# EAGLE board midicontroller (EAGLE 7.0.0)

Size 159.69 x 80 mm. Coordinates in mm from the lower left corner, seen from the top.
Outline: 0,0 159.69,0 159.69,80 0,80 0,0
Copper layers (1*16): Top 0.035mm / dielectric 1.5mm / Bottom 0.035mm
Design rules "default": minimum track width 10mil, minimum drill 24mil, track to track 8mil, track to pad 8mil, pad to pad 8mil, via to via 8mil, smd to smd 8mil, copper to edge 40mil, drill to drill 8mil, minimum pad ring 10mil, minimum via ring 8mil, stop-mask expansion 4mil, vias tented up to drill 0mil, thermal gap 10mil

## Footprints (pad centres in the part's own frame; a part is rotated, then mirrored left to right if it is on the bottom)
DIL24-6 = drill 0.813 long: 1 -13.97,-7.62; 2 -11.43,-7.62; 3 -8.89,-7.62; 4 -6.35,-7.62; 5 -3.81,-7.62; 6 -1.27,-7.62; 7 1.27,-7.62; 8 3.81,-7.62; 9 6.35,-7.62; 10 8.89,-7.62; 11 11.43,-7.62; 12 13.97,-7.62; 13 13.97,7.62; 14 11.43,7.62; 15 8.89,7.62; 16 6.35,7.62; 17 3.81,7.62; 18 1.27,7.62; 19 -1.27,7.62; 20 -3.81,7.62; 21 -6.35,7.62; 22 -8.89,7.62; 23 -11.43,7.62; 24 -13.97,7.62
2X3 = drill 1.016 pad 1.88 octagon: 1 0,0; 2 0,2.54; 3 2.54,0; 4 2.54,2.54; 5 5.08,0; 6 5.08,2.54
1X02 = drill 1.016 long: 1 -1.27,0; 2 1.27,0
5-2,5 = smd 2.54 x 5.08: 1 0,0
ARDUINO_PRO_MICRO = drill 1.016 pad 1.88: 1 -7.62,12.7; 2 -7.62,10.16; 3 -7.62,7.62; 4 -7.62,5.08; 5 -7.62,2.54; 6 -7.62,0; 7 -7.62,-2.54; 8 -7.62,-5.08; 9 -7.62,-7.62; 10 -7.62,-10.16; 11 -7.62,-12.7; 12 -7.62,-15.24; 13 7.62,-15.24; 14 7.62,-12.7; 15 7.62,-10.16; 16 7.62,-7.62; 17 7.62,-5.08; 18 7.62,-2.54; 19 7.62,0; 20 7.62,2.54; 21 7.62,5.08; 22 7.62,7.62; 23 7.62,10.16; 24 7.62,12.7

## Placement (x,y rotation side)
IC1  4067N  [DIL24-6]  10.16,54.61 270 top
IC2  4067N  [DIL24-6]  29.21,54.61 270 top
IC3  4067N  [DIL24-6]  91.44,49.53 270 top
IC4  4067N  [DIL24-6]  48.26,54.61 270 top
IC5  4067N  [DIL24-6]  69.85,54.61 270 top
JP1  AVR_SPI_PRG_6PTH  [2X3]  -97.79,59.69 0 top  (outside the outline)
JP2  [1X02]  -77.47,109.22 0 top  (outside the outline)
PAD0  WIREPADSMD5-2,5  [5-2,5]  -25.4,110.49 0 top  (outside the outline)
PAD1  WIREPADSMD5-2,5  [5-2,5]  -30.48,110.49 0 top  (outside the outline)
PAD2  WIREPADSMD5-2,5  [5-2,5]  -35.56,110.49 0 top  (outside the outline)
PAD3  WIREPADSMD5-2,5  [5-2,5]  -40.64,110.49 0 top  (outside the outline)
PAD4  WIREPADSMD5-2,5  [5-2,5]  -45.72,110.49 0 top  (outside the outline)
PAD5  WIREPADSMD5-2,5  [5-2,5]  -50.8,110.49 0 top  (outside the outline)
PAD6  WIREPADSMD5-2,5  [5-2,5]  -55.88,110.49 0 top  (outside the outline)
PAD7  WIREPADSMD5-2,5  [5-2,5]  -60.96,110.49 0 top  (outside the outline)
PAD8  WIREPADSMD5-2,5  [5-2,5]  -66.04,110.49 0 top  (outside the outline)
PAD9  WIREPADSMD5-2,5  [5-2,5]  -71.12,110.49 0 top  (outside the outline)
PAD10  WIREPADSMD5-2,5  [5-2,5]  -15.24,80.01 0 top  (outside the outline)
PAD11  WIREPADSMD5-2,5  [5-2,5]  -20.32,80.01 0 top  (outside the outline)
PAD12  WIREPADSMD5-2,5  [5-2,5]  -25.4,80.01 0 top  (outside the outline)
PAD13  WIREPADSMD5-2,5  [5-2,5]  -30.48,80.01 0 top  (outside the outline)
PAD14  WIREPADSMD5-2,5  [5-2,5]  -35.56,80.01 0 top  (outside the outline)
PAD15  WIREPADSMD5-2,5  [5-2,5]  -40.64,80.01 0 top  (outside the outline)
PAD16  WIREPADSMD5-2,5  [5-2,5]  -45.72,80.01 0 top  (outside the outline)
PAD17  WIREPADSMD5-2,5  [5-2,5]  -50.8,80.01 0 top  (outside the outline)
PAD18  WIREPADSMD5-2,5  [5-2,5]  -55.88,80.01 0 top  (outside the outline)
PAD19  WIREPADSMD5-2,5  [5-2,5]  -60.96,80.01 0 top  (outside the outline)
PAD20  WIREPADSMD5-2,5  [5-2,5]  -66.04,80.01 0 top  (outside the outline)
PAD21  WIREPADSMD5-2,5  [5-2,5]  -71.12,80.01 0 top  (outside the outline)
PAD22  WIREPADSMD5-2,5  [5-2,5]  -76.2,80.01 0 top  (outside the outline)
PAD23  WIREPADSMD5-2,5  [5-2,5]  -81.28,80.01 0 top  (outside the outline)
PAD24  WIREPADSMD5-2,5  [5-2,5]  -86.36,80.01 0 top  (outside the outline)
PAD25  WIREPADSMD5-2,5  [5-2,5]  -91.44,80.01 0 top  (outside the outline)
PAD26  WIREPADSMD5-2,5  [5-2,5]  -96.52,80.01 0 top  (outside the outline)
PAD27  WIREPADSMD5-2,5  [5-2,5]  -15.24,87.63 0 top  (outside the outline)
PAD28  WIREPADSMD5-2,5  [5-2,5]  -20.32,87.63 0 top  (outside the outline)
PAD29  WIREPADSMD5-2,5  [5-2,5]  -25.4,87.63 0 top  (outside the outline)
PAD30  WIREPADSMD5-2,5  [5-2,5]  -30.48,87.63 0 top  (outside the outline)
PAD31  WIREPADSMD5-2,5  [5-2,5]  -35.56,87.63 0 top  (outside the outline)
PAD32  WIREPADSMD5-2,5  [5-2,5]  -40.64,87.63 0 top  (outside the outline)
PAD33  WIREPADSMD5-2,5  [5-2,5]  -45.72,87.63 0 top  (outside the outline)
PAD34  WIREPADSMD5-2,5  [5-2,5]  -50.8,87.63 0 top  (outside the outline)
PAD35  WIREPADSMD5-2,5  [5-2,5]  -55.88,87.63 0 top  (outside the outline)
PAD36  WIREPADSMD5-2,5  [5-2,5]  -60.96,87.63 0 top  (outside the outline)
PAD37  WIREPADSMD5-2,5  [5-2,5]  -66.04,87.63 0 top  (outside the outline)
PAD38  WIREPADSMD5-2,5  [5-2,5]  -71.12,87.63 0 top  (outside the outline)
PAD39  WIREPADSMD5-2,5  [5-2,5]  -76.2,87.63 0 top  (outside the outline)
PAD40  WIREPADSMD5-2,5  [5-2,5]  -81.28,87.63 0 top  (outside the outline)
PAD41  WIREPADSMD5-2,5  [5-2,5]  -86.36,87.63 0 top  (outside the outline)
PAD42  WIREPADSMD5-2,5  [5-2,5]  -91.44,87.63 0 top  (outside the outline)
PAD43  WIREPADSMD5-2,5  [5-2,5]  -96.52,87.63 0 top  (outside the outline)
PAD44  WIREPADSMD5-2,5  [5-2,5]  -15.24,95.25 0 top  (outside the outline)
PAD45  WIREPADSMD5-2,5  [5-2,5]  -20.32,95.25 0 top  (outside the outline)
PAD46  WIREPADSMD5-2,5  [5-2,5]  -25.4,95.25 0 top  (outside the outline)
PAD47  WIREPADSMD5-2,5  [5-2,5]  -30.48,95.25 0 top  (outside the outline)
PAD48  WIREPADSMD5-2,5  [5-2,5]  -35.56,95.25 0 top  (outside the outline)
PAD49  WIREPADSMD5-2,5  [5-2,5]  -40.64,95.25 0 top  (outside the outline)
PAD50  WIREPADSMD5-2,5  [5-2,5]  -45.72,95.25 0 top  (outside the outline)
PAD51  WIREPADSMD5-2,5  [5-2,5]  -50.8,95.25 0 top  (outside the outline)
PAD52  WIREPADSMD5-2,5  [5-2,5]  -55.88,95.25 0 top  (outside the outline)
PAD53  WIREPADSMD5-2,5  [5-2,5]  -60.96,95.25 0 top  (outside the outline)
PAD54  WIREPADSMD5-2,5  [5-2,5]  -66.04,95.25 0 top  (outside the outline)
PAD55  WIREPADSMD5-2,5  [5-2,5]  -71.12,95.25 0 top  (outside the outline)
PAD56  WIREPADSMD5-2,5  [5-2,5]  -76.2,95.25 0 top  (outside the outline)
PAD57  WIREPADSMD5-2,5  [5-2,5]  -81.28,95.25 0 top  (outside the outline)
PAD58  WIREPADSMD5-2,5  [5-2,5]  -86.36,95.25 0 top  (outside the outline)
PAD59  WIREPADSMD5-2,5  [5-2,5]  -91.44,95.25 0 top  (outside the outline)
PAD60  WIREPADSMD5-2,5  [5-2,5]  -96.52,95.25 0 top  (outside the outline)
PAD61  WIREPADSMD5-2,5  [5-2,5]  -15.24,102.87 0 top  (outside the outline)
PAD62  WIREPADSMD5-2,5  [5-2,5]  -20.32,102.87 0 top  (outside the outline)
PAD63  WIREPADSMD5-2,5  [5-2,5]  -25.4,102.87 0 top  (outside the outline)
PAD64  WIREPADSMD5-2,5  [5-2,5]  -30.48,102.87 0 top  (outside the outline)
PAD65  WIREPADSMD5-2,5  [5-2,5]  -35.56,102.87 0 top  (outside the outline)
PAD66  WIREPADSMD5-2,5  [5-2,5]  -40.64,102.87 0 top  (outside the outline)
PAD67  WIREPADSMD5-2,5  [5-2,5]  -45.72,102.87 0 top  (outside the outline)
PAD68  WIREPADSMD5-2,5  [5-2,5]  -50.8,102.87 0 top  (outside the outline)
PAD69  WIREPADSMD5-2,5  [5-2,5]  -55.88,102.87 0 top  (outside the outline)
PAD70  WIREPADSMD5-2,5  [5-2,5]  -60.96,102.87 0 top  (outside the outline)
PAD71  WIREPADSMD5-2,5  [5-2,5]  -66.04,102.87 0 top  (outside the outline)
PAD72  WIREPADSMD5-2,5  [5-2,5]  -71.12,102.87 0 top  (outside the outline)
PAD73  WIREPADSMD5-2,5  [5-2,5]  -76.2,102.87 0 top  (outside the outline)
PAD74  WIREPADSMD5-2,5  [5-2,5]  -81.28,102.87 0 top  (outside the outline)
PAD75  WIREPADSMD5-2,5  [5-2,5]  -86.36,102.87 0 top  (outside the outline)
PAD76  WIREPADSMD5-2,5  [5-2,5]  -91.44,102.87 0 top  (outside the outline)
PAD77  WIREPADSMD5-2,5  [5-2,5]  -96.52,102.87 0 top  (outside the outline)
PAD78  WIREPADSMD5-2,5  [5-2,5]  -15.24,110.49 0 top  (outside the outline)
PAD79  WIREPADSMD5-2,5  [5-2,5]  -20.32,110.49 0 top  (outside the outline)
U$1  ARDUINO_PRO_MICRO  [ARDUINO_PRO_MICRO]  8.89,19.05 0 top

## Library data of the parts
IC1-IC5 = 40xx
JP1 = SparkFun-Connectors
JP2 = pinhead
PAD0 PAD1-PAD79 = wirepad
U$1 = SparkFun-Boards

## Nets
A: IC1.10 IC2.10 IC3.10 IC4.10 IC5.10
A0: IC5.1 U$1.17
A1: IC4.1 U$1.18
A2: IC3.1 U$1.19
A3: IC2.1 U$1.20
B: IC1.11 IC2.11 IC3.11 IC4.11 IC5.11
C: IC1.14 IC2.14 IC3.14 IC4.14 IC5.14
D: IC1.13 IC2.13 IC3.13 IC4.13 IC5.13
D10: IC1.1 U$1.13
GND: JP1.6 U$1.23
INH: IC1.15 IC2.15 IC3.15 IC4.15 IC5.15
MISO: JP1.1 U$1.15
MOSI: JP1.4 U$1.14
N$1: IC5.8 PAD1.1
N$2: IC5.7 PAD2.1
N$3: IC5.6 PAD3.1
N$4: IC5.5 PAD4.1
N$5: IC5.4 PAD5.1
N$6: IC5.3 PAD6.1
N$7: IC5.2 PAD7.1
N$8: IC5.23 PAD8.1
N$9: IC5.22 PAD9.1
N$10: IC5.21 PAD10.1
N$11: IC5.20 PAD11.1
N$12: IC5.19 PAD12.1
N$13: IC5.18 PAD13.1
N$14: IC5.17 PAD14.1
N$15: IC5.16 PAD15.1
N$16: IC4.9 PAD16.1
N$17: IC4.8 PAD17.1
N$18: IC4.7 PAD18.1
N$19: IC4.6 PAD19.1
N$20: IC4.5 PAD20.1
N$21: IC4.4 PAD21.1
N$22: IC4.3 PAD22.1
N$23: IC4.2 PAD23.1
N$24: IC4.23 PAD24.1
N$25: IC4.22 PAD25.1
N$26: IC4.21 PAD26.1
N$27: IC4.20 PAD27.1
N$28: IC4.19 PAD28.1
N$29: IC4.18 PAD29.1
N$30: IC4.17 PAD30.1
N$31: IC4.16 PAD31.1
N$32: IC3.9 PAD32.1
N$33: IC3.8 PAD33.1
N$34: IC3.7 PAD34.1
N$35: IC3.6 PAD35.1
N$36: IC3.5 PAD36.1
N$37: IC3.4 PAD37.1
N$38: IC3.3 PAD38.1
N$39: IC3.2 PAD39.1
N$40: IC3.23 PAD40.1
N$41: IC3.22 PAD41.1
N$42: IC3.21 PAD42.1
N$43: IC3.20 PAD43.1
N$44: IC3.18 PAD45.1
N$45: IC3.17 PAD46.1
N$46: IC3.16 PAD47.1
N$47: IC2.9 PAD48.1
N$48: IC2.8 PAD49.1
N$49: IC2.7 PAD50.1
N$50: IC2.6 PAD51.1
N$51: IC2.5 PAD52.1
N$52: IC2.4 PAD53.1
N$53: IC2.3 PAD54.1
N$54: IC2.2 PAD55.1
N$55: IC2.23 PAD56.1
N$56: IC2.22 PAD57.1
N$57: IC2.21 PAD58.1
N$58: IC2.20 PAD59.1
N$59: IC2.19 PAD60.1
N$60: IC2.18 PAD61.1
N$61: IC2.17 PAD62.1
N$62: IC2.16 PAD63.1
N$63: IC1.9 PAD64.1
N$64: IC1.8 PAD65.1
N$65: IC1.7 PAD66.1
N$66: IC1.6 PAD67.1
N$67: IC1.5 PAD68.1
N$68: IC1.4 PAD69.1
N$69: IC1.3 PAD70.1
N$70: IC1.2 PAD71.1
N$71: IC1.23 PAD72.1
N$72: IC1.22 PAD73.1
N$73: IC1.21 PAD74.1
N$74: IC1.20 PAD75.1
N$75: IC1.19 PAD76.1
N$76: IC1.18 PAD77.1
N$77: IC1.17 PAD78.1
N$78: IC1.16 PAD79.1
N$79: IC5.9 PAD0.1
N$80: JP1.2 JP2.1
RST: JP1.5 U$1.22
SCK: JP1.3 U$1.16
VCC: JP2.2 U$1.21
VDD: IC1.24 IC2.24 IC3.24 IC4.24 IC5.24
VSS: IC1.12 IC2.12 IC3.12 IC4.12 IC5.12

## Tracks (layer width: path | path; a pad name or v marks a point on that pad's centre or on a via)
A  (4 unrouted)
A0  (1 unrouted)
A1  (1 unrouted)
A2  (1 unrouted)
A3  (1 unrouted)
B  (4 unrouted)
C  (4 unrouted)
D  (4 unrouted)
D10  (1 unrouted)
GND  (1 unrouted)
INH  (4 unrouted)
MISO  (1 unrouted)
MOSI  (1 unrouted)
N$1  (1 unrouted)
N$2  (1 unrouted)
N$3  (1 unrouted)
N$4  (1 unrouted)
N$5  (1 unrouted)
N$6  (1 unrouted)
N$7  (1 unrouted)
N$8  (1 unrouted)
N$9  (1 unrouted)
N$10  (1 unrouted)
N$11  (1 unrouted)
N$12  (1 unrouted)
N$13  (1 unrouted)
N$14  (1 unrouted)
N$15  (1 unrouted)
N$16  (1 unrouted)
N$17  (1 unrouted)
N$18  (1 unrouted)
N$19  (1 unrouted)
N$20  (1 unrouted)
N$21  (1 unrouted)
N$22  (1 unrouted)
N$23  (1 unrouted)
N$24  (1 unrouted)
N$25  (1 unrouted)
N$26  (1 unrouted)
N$27  (1 unrouted)
N$28  (1 unrouted)
N$29  (1 unrouted)
N$30  (1 unrouted)
N$31  (1 unrouted)
N$32  (1 unrouted)
N$33  (1 unrouted)
N$34  (1 unrouted)
N$35  (1 unrouted)
N$36  (1 unrouted)
N$37  (1 unrouted)
N$38  (1 unrouted)
N$39  (1 unrouted)
N$40  (1 unrouted)
N$41  (1 unrouted)
N$42  (1 unrouted)
N$43  (1 unrouted)
N$44  (1 unrouted)
N$45  (1 unrouted)
N$46  (1 unrouted)
N$47  (1 unrouted)
N$48  (1 unrouted)
N$49  (1 unrouted)
N$50  (1 unrouted)
N$51  (1 unrouted)
N$52  (1 unrouted)
N$53  (1 unrouted)
N$54  (1 unrouted)
N$55  (1 unrouted)
N$56  (1 unrouted)
N$57  (1 unrouted)
N$58  (1 unrouted)
N$59  (1 unrouted)
N$60  (1 unrouted)
N$61  (1 unrouted)
N$62  (1 unrouted)
N$63  (1 unrouted)
N$64  (1 unrouted)
N$65  (1 unrouted)
N$66  (1 unrouted)
N$67  (1 unrouted)
N$68  (1 unrouted)
N$69  (1 unrouted)
N$70  (1 unrouted)
N$71  (1 unrouted)
N$72  (1 unrouted)
N$73  (1 unrouted)
N$74  (1 unrouted)
N$75  (1 unrouted)
N$76  (1 unrouted)
N$77  (1 unrouted)
N$78  (1 unrouted)
N$79  (1 unrouted)
N$80  (1 unrouted)
RST  (1 unrouted)
SCK  (1 unrouted)
VCC  (1 unrouted)
VDD  (4 unrouted)
VSS  (4 unrouted)